# Altium PCB MODEM.PcbDoc
Units mm, origin at the board's own origin, x right, y up, seen from the top; angles counter-clockwise.
Board outline 93 x 45 mm, 2 copper layers (Top Layer, Bottom Layer); 98 components, 82 nets, 361 pads, 0 vias.
Unrouted connection lines stored in the file: 255.
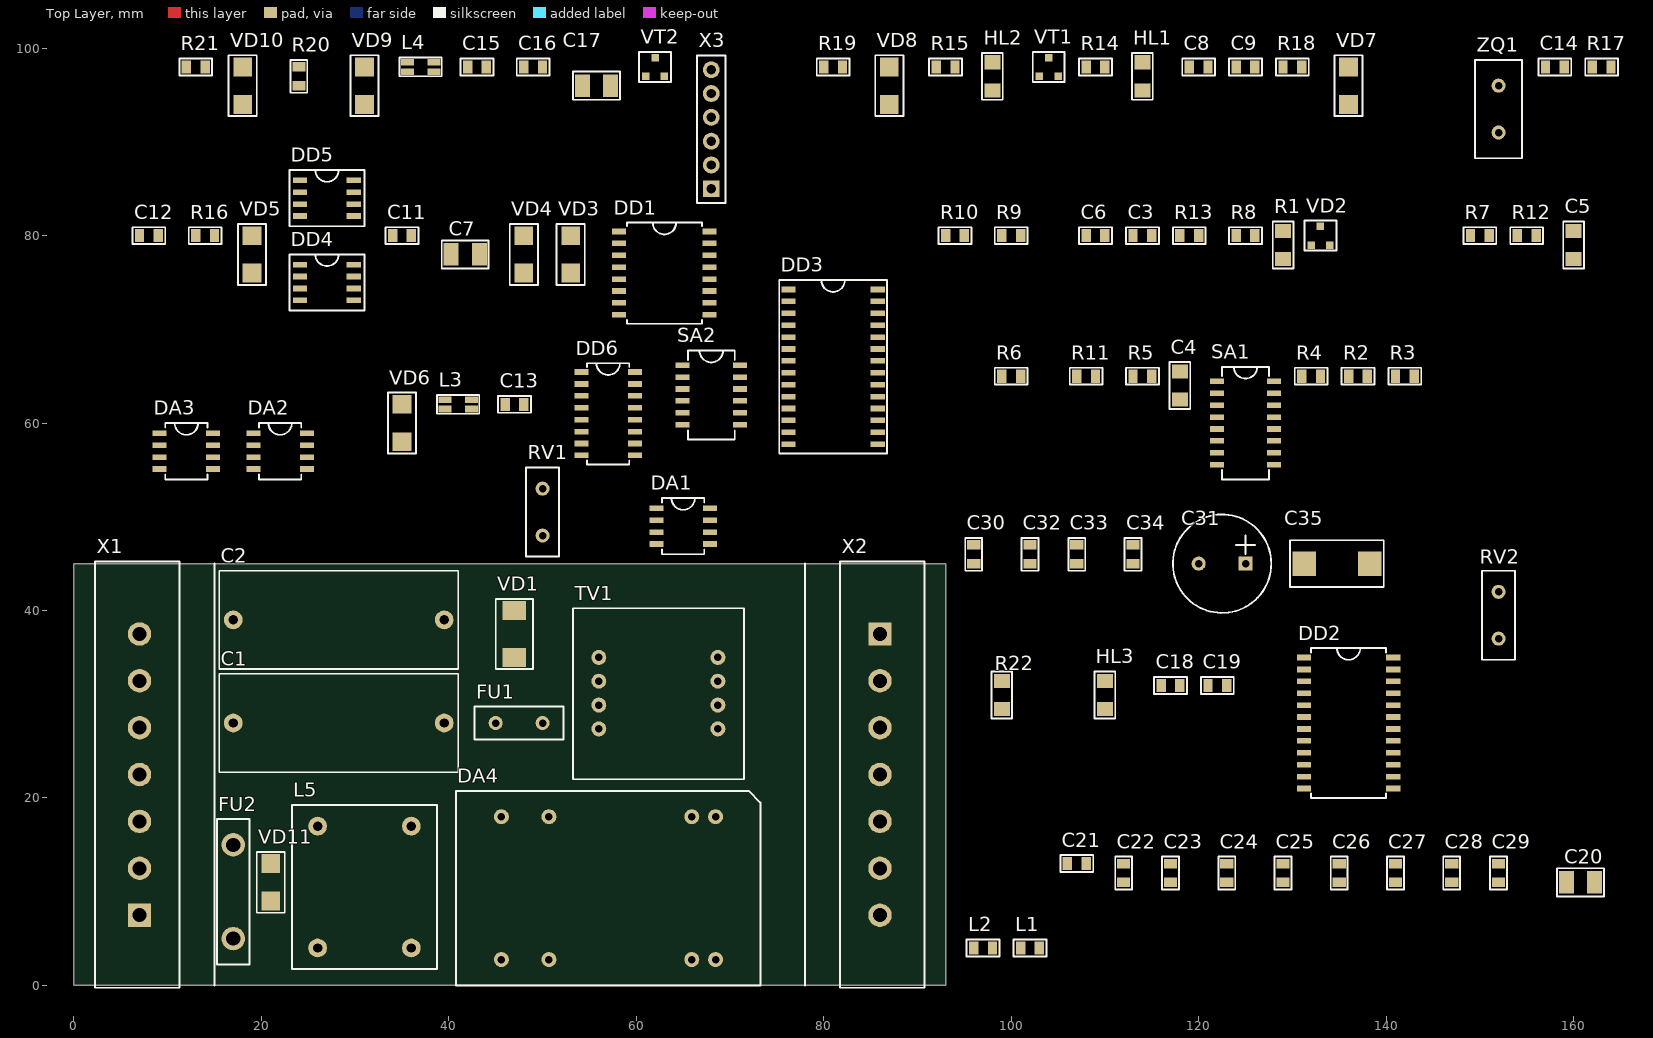
[diagram p0: Top Layer view]
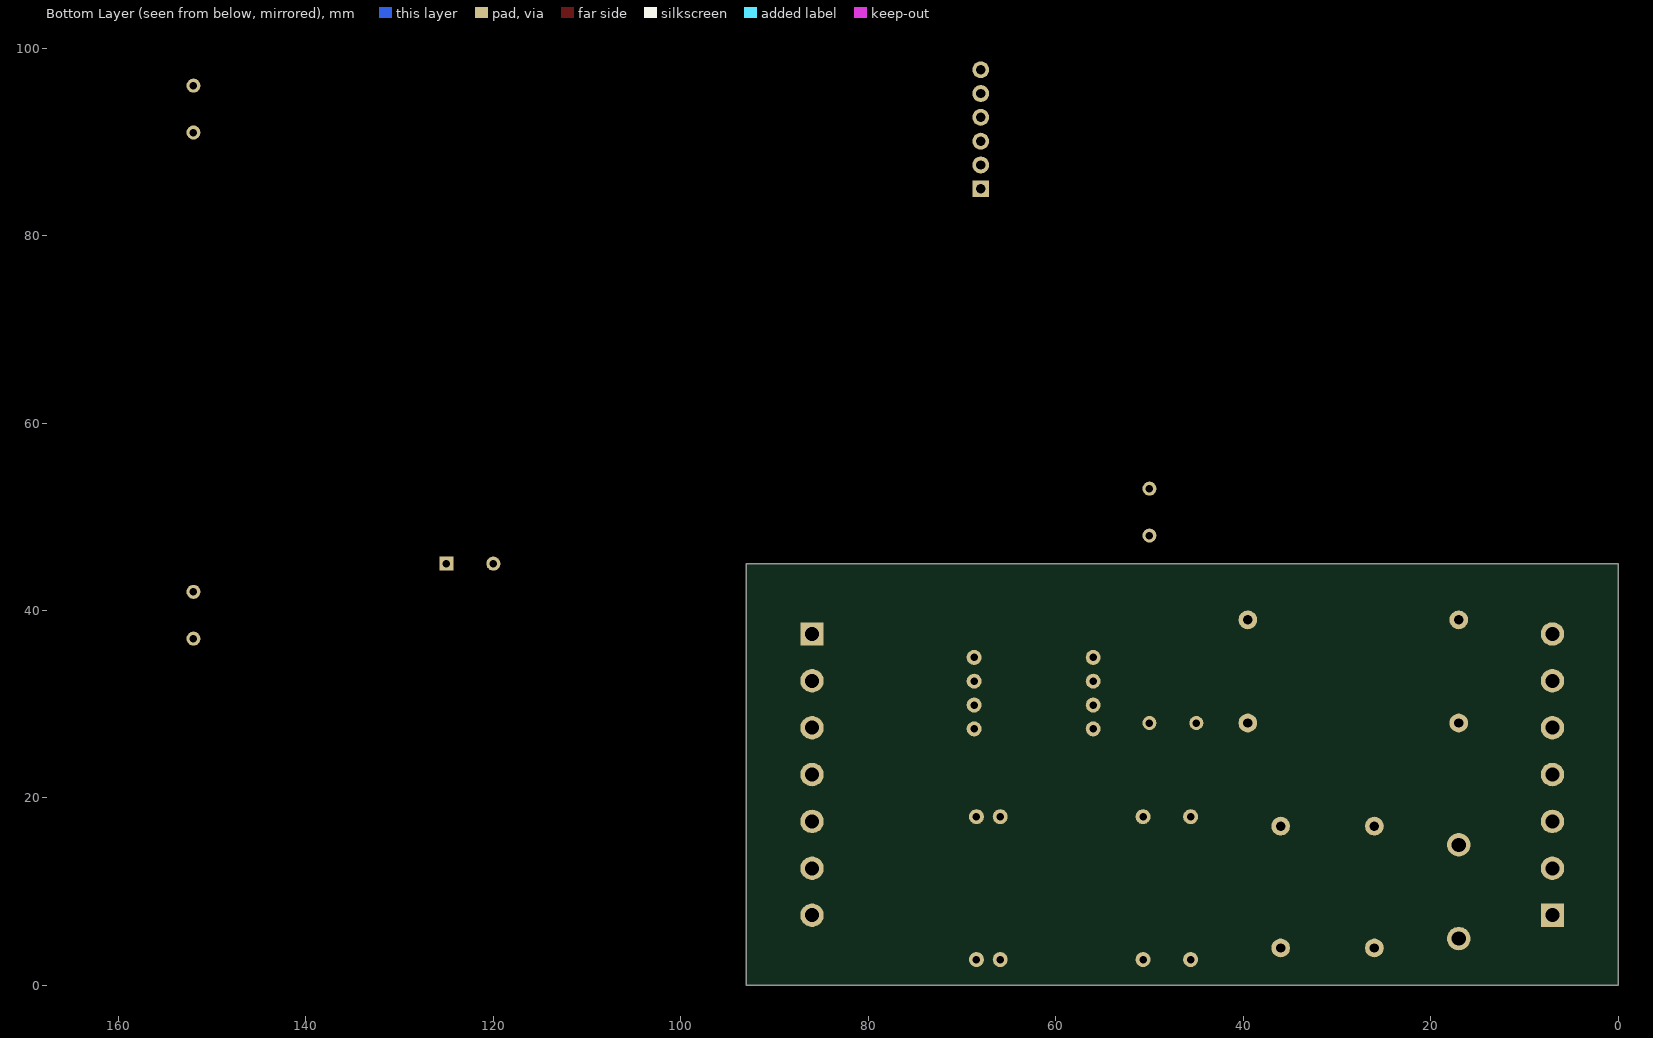
[diagram p1: Bottom Layer view, seen from below]

## Layer stack, top to bottom
Top Solder: solder mask 0.0102, Solder Resist, Dk 3.5
Top Layer: signal copper 0.0356
Dielectric 1: dielectric 0.32, FR-4, Dk 4.8
Bottom Layer: signal copper 0.0356
Bottom Solder: solder mask 0.0102, Solder Resist, Dk 3.5

## Board outline
0,0 0,45 93,45 93,0

## Design rules (kind name [scope] priority, off if disabled: settings)
Clearance [All] p1: gap=0.254
PolygonConnect [All] p1: connectstyle=Relief reliefconductorwidth=0.254 reliefentries=4 polygonreliefangle="90 Angle" airgapwidth=0.254
RoutingVias [All] p1: holewidth=0.711 width=1.27 viastyle="Through Hole" minholewidth=0.711 minwidth=1.27 maxholewidth=0.711 maxwidth=1.27
SolderMaskExpansion [All] p1: expansion=0.102
Width [All] p1: maxlimit=0.254 minlimit=0.254 preferedwidth=0.254
30 further rules are at their usual default settings.

## Components (designator, comment, footprint, x,y, rotation, side; value= is the part's Value field where it differs from the comment)
C1 "1.5uF" TS02-22.5 17,28 r0 top
C2 "1.5uF" TS02-22.5 17,39 r0 top
C3 "0.15uF" CC0805 114,80 r0 top
C4 "1.5uF" CC1206 118,64 r90 top
C5 "1.5uF" CC1206 160,79 r90 top
C6 "100pF" CC0805 109,80 r0 top
C7 "10uF" SMB 40,78 r0 top
C8 "20pF" CC0805 120,98 r0 top
C9 "20pF" CC0805 125,98 r0 top
C11 "0.1uF" CC0805 35,80 r0 top
C12 "0.1uF" CC0805 8,80 r0 top
C13 "0.1uF" CC0805 47,62 r0 top
C14 "0.1uF" CC0805 158,98 r0 top
C15 "0.1uF" CC0805 43,98 r0 top
C16 "0.1uF" CC0805 49,98 r0 top
C17 "10uF" SMB 54,96 r0 top
C18 "0.1uF" CC0805 117,32 r0 top
C19 "0.1uF" CC0805 122,32 r0 top
C20 "10uF" SMB 159,11 r0 top
C21 "0.1uF" CC0805 107,13 r0 top
C22 "0.1uF" CC0805 112,12 r90 top
C23 "0.1uF" CC0805 117,12 r90 top
C24 "0.1uF" CC0805 123,12 r90 top
C25 "0.1uF" CC0805 129,12 r90 top
C26 "0.1uF" CC0805 135,12 r90 top
C27 "0.1uF" CC0805 141,12 r90 top
C28 "0.1uF" CC0805 147,12 r90 top
C29 "0.1uF" CC0805 152,12 r90 top
C30 "0.1uF" CC0805 96,46 r90 top
C31 "220uF" SH050-1019 120,45 r0 top
C32 "0.1uF" CC0805 102,46 r90 top
C33 "0.1uF" CC0805 107,46 r90 top
C34 "0.1uF" CC0805 113,46 r90 top
C35 "47uF" SMD 131,45 r0 top
DA1 "MC33202DG" MC33202DG 65,49 r0 top
DA2 "L78L06ABD" L78L06ABD 22,57 r0 top
DA3 "L78L33ABD" L78L06ABD 12,57 r0 top
DA4 "TEN3-2412WIN" TEN3-2412WIN 71,18 r180 top
DD1 "FX604D4" FX604D4 63,76 r0 top
DD2 "CMX868D2" CMX868D2 136,28 r0 top
DD3 "PIC24HJ128GP502" PIC24HJ128GP502 81,66 r0 top
DD4 "ST3485" SP3485 27,75 r0 top
DD5 "ST3485" SP3485 27,84 r0 top
DD6 "ST3232BDR" ST3232BDR 57,61 r0 top
FU1 "TRF250-120" TRF250-120 45,28 r0 top
FU2 "ВП1-2" VP1-2 17,5 r90 top
HL1 "KP-3216EC" KP-3216EC 114,97 r90 top
HL2 "KP-3216EC" KP-3216EC 98,97 r90 top
HL3 "KP-3216EC" KP-3216EC 110,31 r90 top
L1 "MMZ2012Y202B" MMZ2012Y202B 102,4 r0 top
L2 "MMZ2012Y202B" MMZ2012Y202B 97,4 r0 top
L3 "DLW31SN" DLW31SN 41,62 r0 top
L4 "DLW31SN" DLW31SN 37,98 r0 top
L5 "UU10LF" UU10LF 26,4 r0 top
R1 "200" RC1206 129,79 r90 top
R2 "27K" RC0805 137,65 r0 top
R3 "47.5K" RC0805 142,65 r0 top
R4 "24K" RC0805 132,65 r0 top
R5 "12K" RC0805 114,65 r0 top
R6 "6.04K" RC0805 100,65 r0 top
R7 "47.5K" RC0805 150,80 r0 top
R8 "24K" RC0805 125,80 r0 top
R9 "12K" RC0805 100,80 r0 top
R10 "6.04K" RC0805 94,80 r0 top
R11 "47K" RC0805 108,65 r0 top
R12 "150K" RC0805 155,80 r0 top
R13 "100K" RC0805 119,80 r0 top
R14 "180" RC0805 109,98 r0 top
R15 "180" RC0805 93,98 r0 top
R16 "560" RC0805 14,80 r0 top
R17 "120" RC0805 163,98 r0 top
R18 "560" RC0805 130,98 r0 top
R19 "560" RC0805 81,98 r0 top
R20 "120" RC0805 24,97 r90 top
R21 "560" RC0805 13,98 r0 top
R22 "1.2K" RC1206 99,31 r90 top
RV1 "JVR10N180M87PU5" JVR07N330 50,48 r90 top
RV2 "JVR10N390K87PU5" JVR07N330 152,37 r90 top
SA1 "DHN-08F-V" DHN-08F-V 125,60 r0 top
SA2 "DHN-06F-V" DHN-06F-V 68,63 r0 top
TV1 "LM-NP-1001" LM-NP-1001 56,35 r270 top
VD1 "SM6T6V8CA" SM6T6V8CA 47,35 r90 top
VD2 "BAV199" BAV199 133,80 r0 top
VD3 "SMAJ15CA" SMAJ6.0CA 53,76 r90 top
VD4 "SMAJ15CA" SMAJ6.0CA 48,76 r90 top
VD5 "SMAJ5.0CA" SMAJ6.0CA 19,76 r90 top
VD6 "SMAJ5.0CA" SMAJ6.0CA 35,58 r90 top
VD7 "SMAJ5.0CA" SMAJ6.0CA 136,94 r90 top
VD8 "SMAJ5.0CA" SMAJ6.0CA 87,94 r90 top
VD9 "SMAJ5.0CA" SMAJ6.0CA 31,94 r90 top
VD10 "SMAJ5.0CA" SMAJ6.0CA 18,94 r90 top
VD11 "SS14" SS14 21,9 r90 top
VT1 "BCR135" BCR135 104,98 r0 top
VT2 "BCR135" BCR135 62,98 r0 top
X1 "8113_S/07" 8113_S/07 7,7.5 r90 top
X2 "8113_S/07" 8113_S/07 86,37.5 r270 top
X3 "PLS-06" PLS-06 68,85 r90 top
ZQ1 "3.58M" HC-49/S 152,91 r90 top

## Footprints (in the part's own frame and the unit in brackets; to place one, negate y for a bottom-side part, rotate by r counter-clockwise, add the part's x,y. Pads: shape width x height; smd on the part's side, far side on the other; paste and mask are expansions set on the pad)
8113_S/07 [mm]
  rect 2.5x2.5 hole 1.5: 1(0,0)
  round 2.5 hole 1.5: 2(5,0) 3(10,0) 4(15,0) 5(20,0) 6(25,0) 7(30,0)
  silkscreen extent -7.75,-4.25 37.75,4.75
BAV199 [mm]
  rect 0.8x0.8 smd: 1(-1,-1) 2(1,-1) 3(0,1)
  silkscreen extent -1.7,-1.6 1.7,1.6
BCR135 [mm]
  rect 0.8x0.8 smd: 1(-1,-1) 2(1,-1) 3(0,1)
  silkscreen extent -1.7,-1.6 1.7,1.6
CC0805 [mm]
  rect 1x1.4 smd: 1(-1,0) 2(1,0)
  silkscreen extent -1.75,-0.9 1.75,0.9
CC1206 [mm]
  rect 1.5x1.7 smd: 1(-1.5,0) 2(1.5,0)
  silkscreen extent -2.5,-1.1 2.5,1.1
CMX868D2 [mm]
  rect 1.5x0.6 smd: 1(-4.763,6.985) 2(-4.763,5.715) 3(-4.763,4.445) 4(-4.763,3.175) 5(-4.763,1.905) 6(-4.763,0.635) 7(-4.763,-0.635) 8(-4.763,-1.905) 9(-4.763,-3.175) 10(-4.763,-4.445) 11(-4.763,-5.715) 12(-4.763,-6.985) 13(4.763,-6.985) 14(4.763,-5.715) 15(4.763,-4.445) 16(4.763,-3.175) 17(4.763,-1.905) 18(4.763,-0.635) 19(4.763,0.635) 20(4.763,1.905) 21(4.763,3.175) 22(4.763,4.445) 23(4.763,5.715) 24(4.763,6.985)
  silkscreen extent -4,-8 4,8
DHN-06F-V [mm]
  rect 1.5x0.6 smd: 1(-3.048,3.175) 2(-3.048,1.905) 3(-3.048,0.635) 4(-3.048,-0.635) 5(-3.048,-1.905) 6(-3.048,-3.175) 7(3.048,-3.175) 8(3.048,-1.905) 9(3.048,-0.635) 10(3.048,0.635) 11(3.048,1.905) 12(3.048,3.175)
  silkscreen extent -2.5,-4.77 2.5,4.73
DHN-08F-V [mm]
  rect 1.5x0.6 smd: 1(-3.048,4.445) 2(-3.048,3.175) 3(-3.048,1.905) 4(-3.048,0.635) 5(-3.048,-0.635) 6(-3.048,-1.905) 7(-3.048,-3.175) 8(-3.048,-4.445) 9(3.048,-4.445) 10(3.048,-3.175) 11(3.048,-1.905) 12(3.048,-0.635) 13(3.048,0.635) 14(3.048,1.905) 15(3.048,3.175) 16(3.048,4.445)
  silkscreen extent -2.5,-6 2.5,6
DLW31SN [mm]
  rect 1.4x0.7 smd mask+0.05: 1(-1.4,-0.5) 2(1.4,-0.5) 3(1.4,0.5) 4(-1.4,0.5)
  silkscreen extent -2.25,-1 2.25,1
FX604D4 [mm]
  rect 1.5x0.6 smd: 1(-4.826,4.445) 2(-4.826,3.175) 3(-4.826,1.905) 4(-4.826,0.635) 5(-4.826,-0.635) 6(-4.826,-1.905) 7(-4.826,-3.175) 8(-4.826,-4.445) 9(4.826,-4.445) 10(4.826,-3.175) 11(4.826,-1.905) 12(4.826,-0.635) 13(4.826,0.635) 14(4.826,1.905) 15(4.826,3.175) 16(4.826,4.445)
  silkscreen extent -4,-5.4 4,5.39
HC-49/S [mm]
  round 1.5 hole 0.8: 1(0,0) 2(5,0)
  silkscreen extent -2.75,-2.5 7.75,2.5
JVR07N330 [mm]
  round 1.5 hole 0.8: 1(0,0) 2(5,0)
  silkscreen extent -2.25,-1.75 7.25,1.75
KP-3216EC [mm]
  rect 1.5x1.7 smd: 1(-1.5,0) 2(1.5,0)
  silkscreen extent -2.5,-1.1 2.5,1.1
L78L06ABD [mm]
  rect 1.5x0.6 smd: 1(-2.857,1.905) 2(-2.857,0.635) 3(-2.857,-0.635) 4(-2.857,-1.905) 5(2.857,-1.905) 6(2.857,-0.635) 7(2.857,0.635) 8(2.857,1.905)
  silkscreen extent -2.25,-3 2.25,3
LM-NP-1001 [mm]
  round 1.6 hole 0.8: 1(0,0) 2(2.54,0) 3(5.08,0) 4(7.62,0) 5(7.62,12.7) 6(5.08,12.7) 7(2.54,12.7) 8(0,12.7)
  silkscreen extent -5.25,-2.75 13,15.5
MC33202DG [mm]
  rect 1.5x0.6 smd: 1(-2.857,1.905) 2(-2.857,0.635) 3(-2.857,-0.635) 4(-2.857,-1.905) 5(2.857,-1.905) 6(2.857,-0.635) 7(2.857,0.635) 8(2.857,1.905)
  silkscreen extent -2.25,-3 2.25,3
MMZ2012Y202B [mm]
  rect 1x1.4 smd: 1(-1,0) 2(1,0)
  silkscreen extent -1.75,-0.9 1.75,0.9
PIC24HJ128GP502 [mm]
  rect 1.5x0.6 smd: 1(-4.763,8.255) 2(-4.763,6.985) 3(-4.763,5.715) 4(-4.763,4.445) 5(-4.763,3.175) 6(-4.763,1.905) 7(-4.763,0.635) 8(-4.763,-0.635) 9(-4.763,-1.905) 10(-4.763,-3.175) 11(-4.763,-4.445) 12(-4.763,-5.715) 13(-4.763,-6.985) 14(-4.763,-8.255) 15(4.763,-8.255) 16(4.763,-6.985) 17(4.763,-5.715) 18(4.763,-4.445) 19(4.763,-3.175) 20(4.763,-1.905) 21(4.763,-0.635) 22(4.763,0.635) 23(4.763,1.905) 24(4.763,3.175) 25(4.763,4.445) 26(4.763,5.715) 27(4.763,6.985) 28(4.763,8.255)
  silkscreen extent -5.75,-9.25 5.75,9.25
PLS-06 [mm]
  rect 1.8x1.8 hole 1: 1(0,0)
  round 1.8 hole 1: 2(2.54,0) 3(5.08,0) 4(7.62,0) 5(10.16,0) 6(12.7,0)
  silkscreen extent -1.52,-1.52 14.22,1.52
RC0805 [mm]
  rect 1x1.4 smd: 1(-1,0) 2(1,0)
  silkscreen extent -1.75,-0.9 1.75,0.9
RC1206 [mm]
  rect 1.5x1.7 smd: 1(-1.5,0) 2(1.5,0)
  silkscreen extent -2.5,-1.1 2.5,1.1
SH050-1019 [mm]
  round 1.5 hole 0.8: 1(0,0)
  rect 1.5x1.5 hole 0.8: 2(5,0)
  silkscreen extent -2.75,-5.25 7.75,5.25
SM6T6V8CA [mm]
  rect 2x2.5 smd: 1(0,0) 2(5,0)
  silkscreen extent -1.25,-2 6.25,2
SMAJ6.0CA [mm]
  rect 2x2 smd: 1(0,0) 2(4,0)
  silkscreen extent -1.25,-1.5 5.25,1.5
SMB [mm]
  rect 1.6x2.4 smd: 1(0.25,0) 2(3.25,0)
  silkscreen extent -0.75,-1.5 4.25,1.5
SMD [mm]
  rect 2.5x2.6 smd: 1(0.25,0) 2(7.25,0)
  silkscreen extent -1.25,-2.5 8.75,2.5
SP3485 [mm]
  rect 1.5x0.6 smd: 1(-2.857,1.905) 2(-2.857,0.635) 3(-2.857,-0.635) 4(-2.857,-1.905) 5(2.857,-1.905) 6(2.857,-0.635) 7(2.857,0.635) 8(2.857,1.905)
  silkscreen extent -4,-3 4,3
SS14 [mm]
  rect 2x2 smd: 1(0,0) 2(4,0)
  silkscreen extent -1.25,-1.5 5.25,1.5
ST3232BDR [mm]
  rect 1.5x0.6 smd: 1(-2.857,4.445) 2(-2.857,3.175) 3(-2.857,1.905) 4(-2.857,0.635) 5(-2.857,-0.635) 6(-2.857,-1.905) 7(-2.857,-3.175) 8(-2.857,-4.445) 9(2.857,-4.445) 10(2.857,-3.175) 11(2.857,-1.905) 12(2.857,-0.635) 13(2.857,0.635) 14(2.857,1.905) 15(2.857,3.175) 16(2.857,4.445)
  silkscreen extent -2.25,-5.4 2.25,5.39
TEN3-2412WIN [mm]
  round 1.6 hole 0.8: 2(2.54,0) 3(5.08,0) 9(20.32,0) 11(25.4,0) 14(25.4,15.24) 16(20.32,15.24) 22(5.08,15.24) 23(2.54,15.24)
  silkscreen extent -2.25,-2.75 30.25,18
TRF250-120 [mm]
  round 1.5 hole 0.8: 1(0,0) 2(5,0)
  silkscreen extent -2.25,-1.75 7.25,1.75
TS02-22.5 [mm]
  round 2 hole 1: 1(0,0) 2(22.5,0)
  silkscreen extent -1.5,-5.25 24,5.25
UU10LF [mm]
  round 2 hole 1: 1(0,0) 2(10,0) 3(0,13) 4(10,13)
  silkscreen extent -2.75,-2.25 12.75,15.25
VP1-2 [mm]
  round 2.5 hole 1.5: 1(0,0) 2(10,0)
  silkscreen extent -2.75,-1.75 12.75,1.75

## Part data
C1 C2 C3 C4 C5 C6 C8 C9 C11 C12 C13 C14 C15 C16 C18 C19 C21 C22 C23 C24 C25 C26 C27 C28 C29 C30 C32 C33 C34: library part CC1206
C7 C17 C20 C31 C35: library part SR-6
DD4 DD5: library part SP3485
DD6: library part SP3232
FU2: library part VPB6
HL1 HL2: library part KP-3216EC_L
HL3: library part KP-3216EC_R
L5: library part TRANS
R1: library part RC1206
R2 R3 R4 R5 R6 R7 R8 R9 R10 R11 R12 R13 R14 R15 R16 R17 R18 R19 R20 R21 R22: library part RC0805
RV1 RV2: library part JVR14N361
VD3 VD4 VD5 VD6 VD7 VD8 VD9 VD10: library part SMAJ6.0CA
ZQ1: library part ZQ

## Nets (pads, with @x,y where several pads share a name; then routed paths per layer and width w, separated by ;. In a path a pad name is that pad's centre, name@x,y a point inside that pad or via, vN(x,y) a via of type N, cw(c..) or ccw(c..) an arc to the next point about the centre after c; other vN are vias at no path point)
232-RX: L2.2 X2.2
232-TX: L1.2 X2.1
422-Y: L4.3 X2.6
422-Z: L4.2 X2.7
485-A: L3.3 X2.4
485-B: L3.2 X2.5
+3.3V: C19.2 C20.2 C21.2 C22.2 C23.2 C24.2 C25.2 C26.2 C27.2 C28.2 C29.2 DA3.1 DD1.16 DD2.7 DD2.16 DD2.24 DD3.13 DD3.28 DD4.8 DD5.2 DD5.3 DD5.8 DD6.16 HL1.1 HL2.1 R16.1 R19.1 X3.2
+6V: C16.2 C17.2 DA1.5 DA2.1 TV1.8
+12V: C15.2 C18.2 C33.2 C34.2 C35.2 DA1.8 DA2.8 DA3.8 DA4.14 R22.1
\SS: DD1.10 DD2.18 DD3.22
A: DD4.6 L3.4 R16.2 R17.1 VD5.1 VD6.2
B: DD4.7 L3.1 R17.2 R18.1 VD6.1 VD7.2
BIAS: DD2.11
C1+: C11.1 DD6.1
C1-: C11.2 DD6.3
C2+: C12.1 DD6.4
C2-: C12.2 DD6.5
DET: DD1.14 DD3.12
GND: C7.1 C8.1 C9.1 C14.1 C15.1 C16.1 C17.1 C18.1 C19.1 C20.1 C21.1 C22.1 C23.1 C24.1 C25.1 C26.1 C27.1 C28.1 C29.1 C33.1 C34.1 C35.1 DA1.4 DA2.2 DA2.3 DA2.6 DA2.7 DA3.2 DA3.3 DA3.6 DA3.7 DA4.16 DD1.8 DD2.4 DD2.5 DD2.8 DD2.12 DD2.17 DD2.21 DD3.19 DD3.27 DD4.5 DD5.5 DD6.15 HL3.2 R18.2 R21.2 SA2.1 SA2.2 SA2.3 SA2.4 SA2.5 SA2.6 VD3.1 VD4.1 VD5.2 VD7.1 VD8.2 VD10.1 VT1.2 VT2.2 X1.5 X2.3 X3.3
HL1: DD3.15 VT1.1
HL2: DD3.16 VT2.1
LINE1: C1.1 X1.6
LINE2: C2.1 X1.7
M0: DD1.3 DD3.2
M1: DD1.4 DD3.3
MCLR: DD3.1 X3.1
MISO: DD1.13 DD2.22 DD3.17
MOSI: DD1.11 DD2.19 DD3.18
NetC1_2: C1.2 FU1.1 RV1.1
NetC2_2: C2.2 RV1.2 TV1.4 VD1.1
NetC3_1: C3.1 R1.2 R7.1 R8.1 R9.1 R10.1 TV1.5
NetC3_2: C3.2 DA1.3 DA1.7 R1.1 R2.1 VD2.1 VD2.2
NetC4_1: C4.1 SA1.13 SA1.14 SA1.15 SA1.16
NetC5_1: C5.1 DA1.1 R11.2
NetC5_2: C5.2 R12.1
NetC7_2: C7.2 DD3.20
NetC30_2: C30.2 FU2.2 L5.3
NetC31_1: C31.1 C32.1 DA4.2 DA4.3 L5.2 RV2.2
NetC31_2: C31.2 C32.2 DA4.22 DA4.23 L5.4 RV2.1
NetDA1_2: DA1.2 R11.1 SA1.9 SA1.10 SA1.11 SA1.12 VD2.3
NetDA1_6: DA1.6 R2.2 R3.1 R4.1 R5.1 R6.1
NetDD3_6: DD3.6 SA2.10
NetDD3_7: DD3.7 SA2.9
NetDD3_11: DD3.11 SA2.8
NetDD3_14: DD3.14 SA2.7
NetFU1_2: FU1.2 TV1.1 VD1.2
NetFU2_1: FU2.1 VD11.2
NetHL1_2: HL1.2 R14.2
NetHL2_2: HL2.2 R15.2
NetHL3_1: HL3.1 R22.2
NetR3_2: R3.2 SA1.1
NetR4_2: R4.2 SA1.2
NetR5_2: R5.2 SA1.3
NetR6_2: R6.2 SA1.4
NetR7_2: R7.2 SA1.5
NetR8_2: R8.2 SA1.6
NetR9_2: R9.2 SA1.7
NetR10_2: R10.2 SA1.8
NetR14_1: R14.1 VT1.3
NetR15_1: R15.1 VT2.3
OSC1: C8.2 DD3.9 ZQ1.1
OSC2: C9.2 DD1.2 DD2.2 DD3.10 ZQ1.2
PGEC1: DD3.5 SA2.11 X3.5
PGED1: DD3.4 SA2.12 X3.4
RDYN: DD1.15 DD2.23 DD3.23
RXD: DD6.8 L2.1 VD4.2
RXFB: C6.2 DD1.6 DD2.9 R13.2
RXIN: C6.1 DD1.5 DD2.10 R12.2 R13.1
SCLK: DD1.12 DD2.20 DD3.21
SMB: C30.1 L5.1 X1.2
SPB: VD11.1 X1.1
T/R\: DD3.26 DD4.2 DD4.3
TXD: DD6.7 L1.1 VD3.2
TXOP: C4.2 DD1.7 DD2.15
U1RX: DD3.24 DD4.1 DD6.9
U1TX: DD3.25 DD4.4 DD5.4 DD6.10
V+: C13.2 DD6.2
V-: C14.2 DD6.6
VBIAS: DD1.9 DD2.13
VDD: C13.1
Y: DD5.6 L4.4 R19.2 R20.1 VD8.1 VD9.2
Z: DD5.7 L4.1 R20.2 R21.1 VD9.1 VD10.2
pads on no net: DA2.4 DA2.5 DA3.4 DA3.5 DA4.9 DA4.11 DD1.1 DD2.1 DD2.3 DD2.6 DD2.14 DD3.8 DD5.1 DD6.11 DD6.12 DD6.13 DD6.14 TV1.2 TV1.3 TV1.6 TV1.7 X1.3 X1.4 X3.6

## Silkscreen, mask and mechanical layers (free items; w line width, h text height)
Top Overlay:
  lines w0.254: 15,0 15,45 ; 78,0 78,45
Mechanical 4:
  the board outline again, w0.254